# Altium PCB PowerBoard.PcbDoc
Units mm, origin at the board's own origin, x right, y up, seen from the top; angles counter-clockwise.
Board outline 150 x 100 mm, 2 copper layers (Top Layer, Bottom Layer), stack 1.671 mm thick; 51 components, 34 nets, 146 pads, 45 vias.
Unrouted connection lines stored in the file: 2.
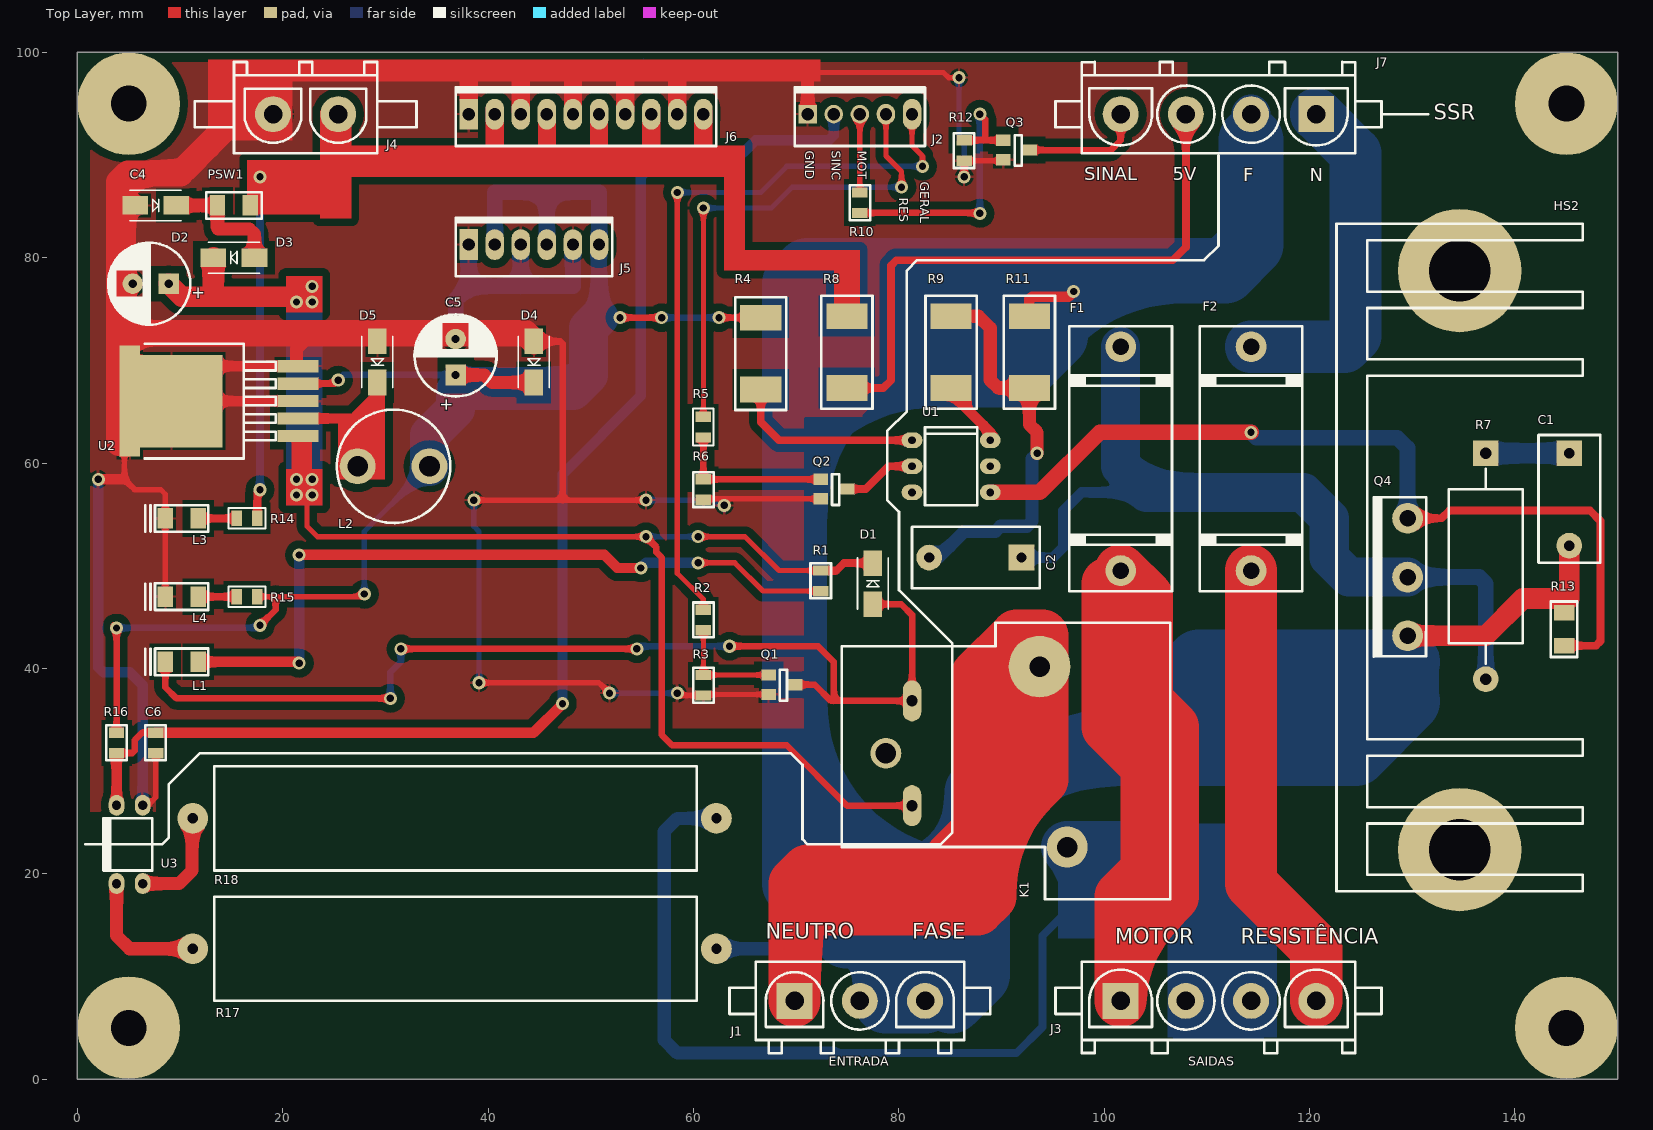
[diagram p0: Top Layer view]
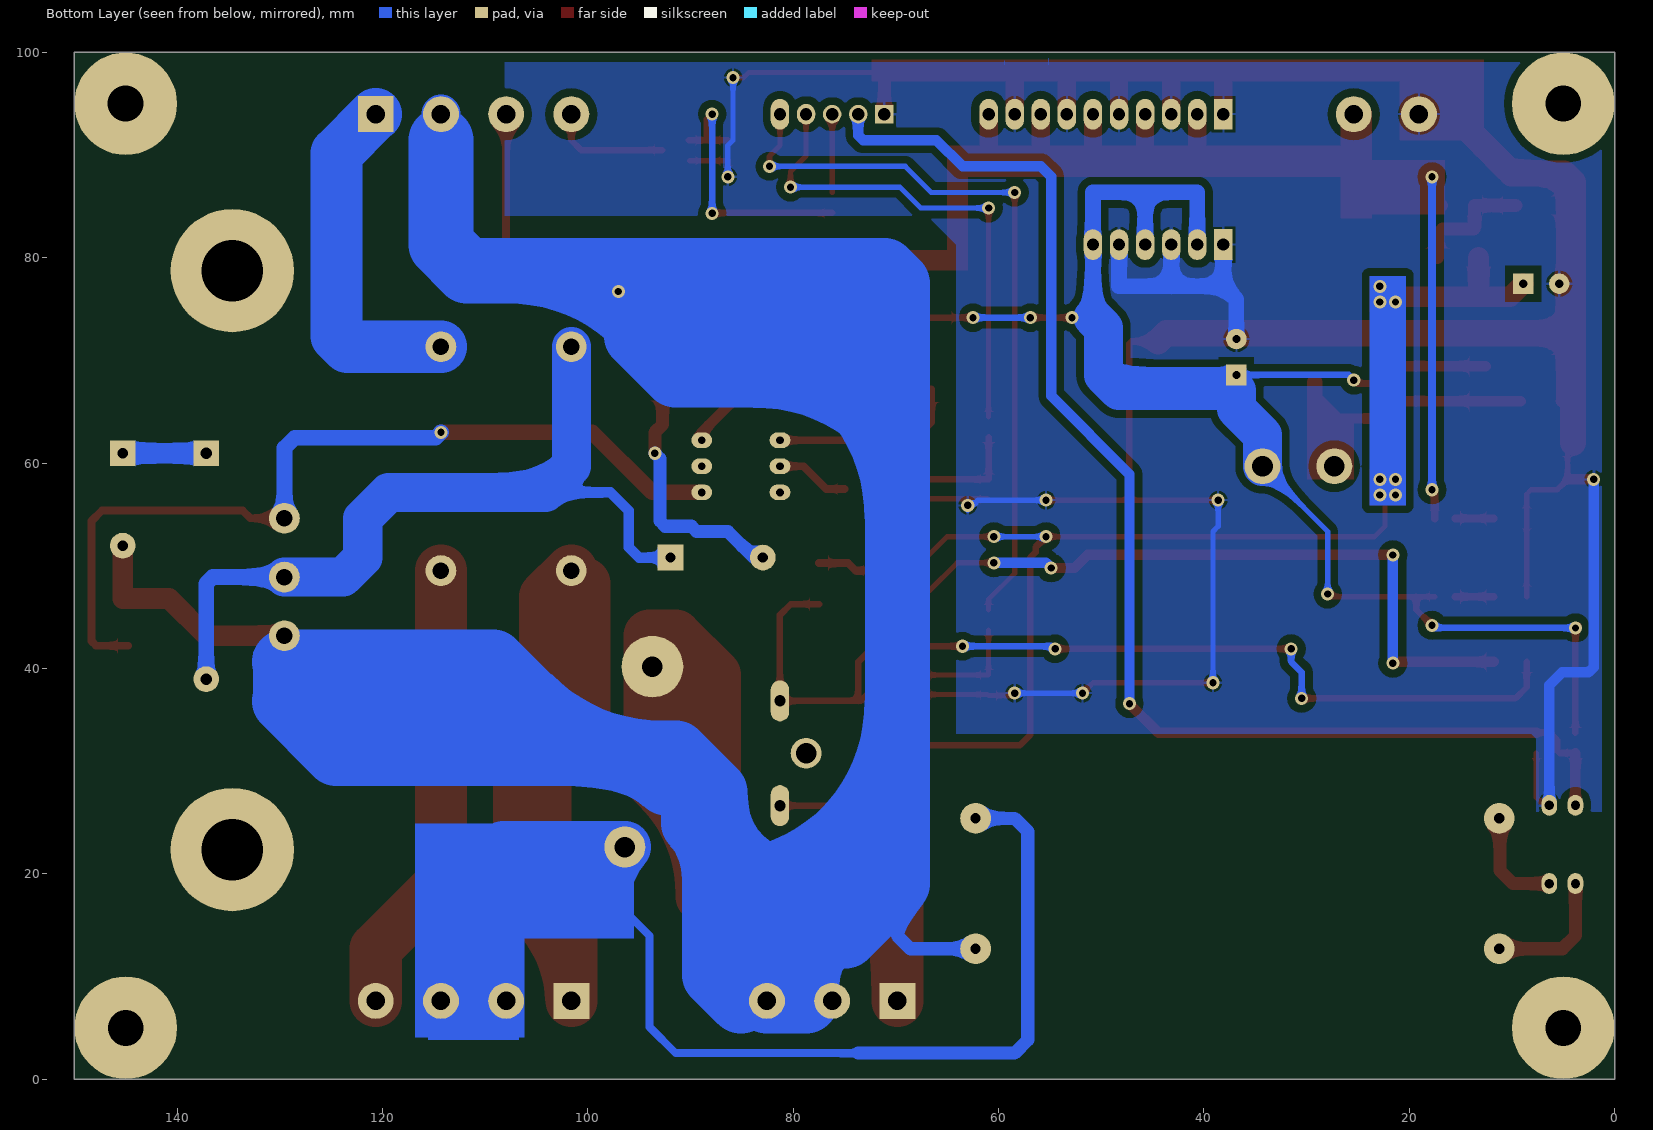
[diagram p1: Bottom Layer view, seen from below]
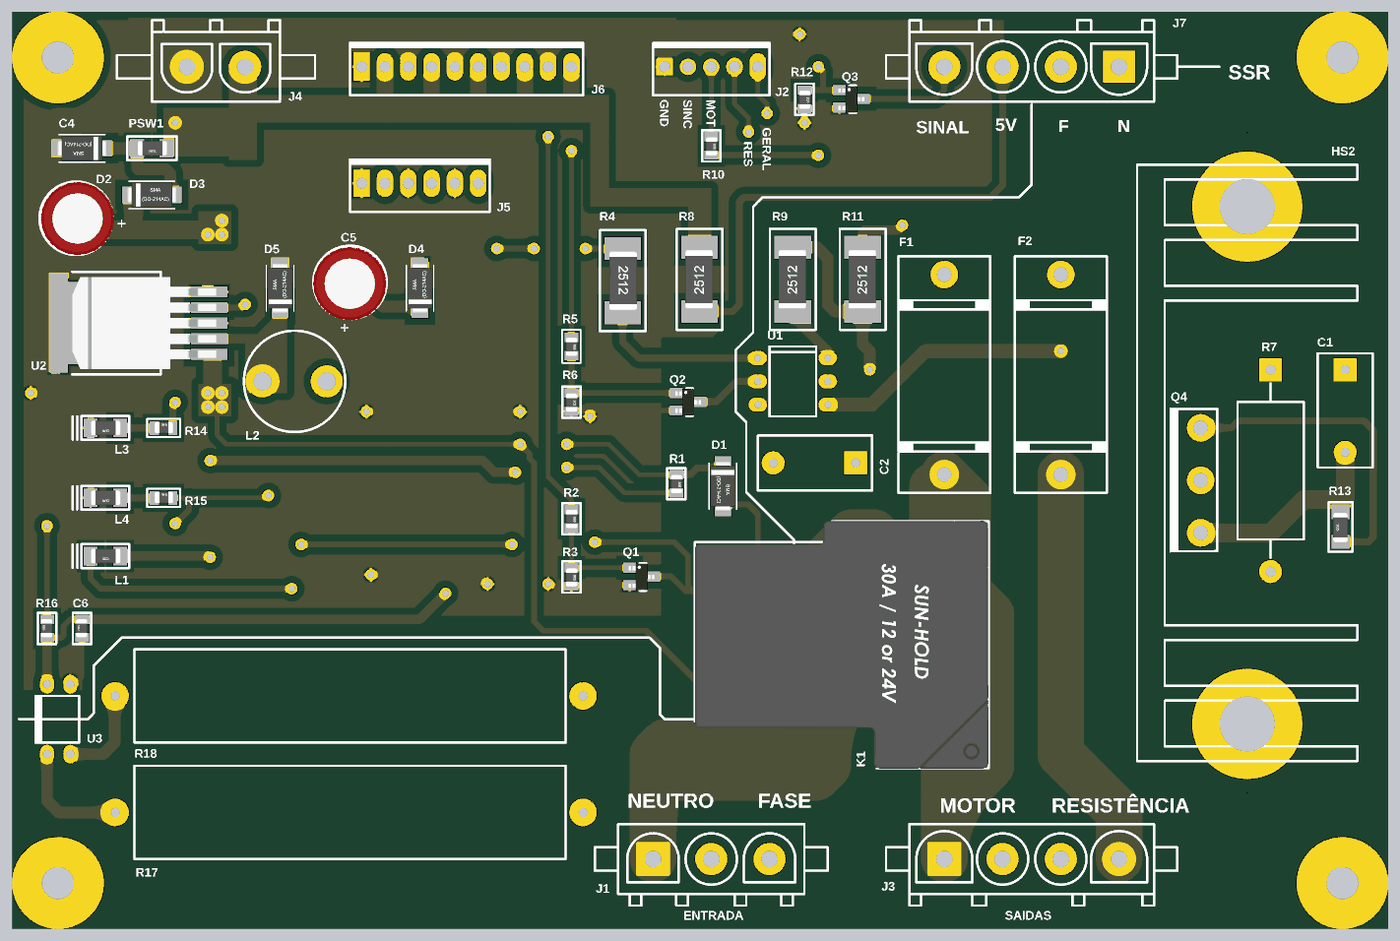
[diagram p2: 3D render of the assembled board from above, using the file's embedded part models]

## Layer stack, top to bottom
Top Solder: solder mask 0.0102, Solder Resist, Dk 3.5
Top Layer: signal copper 0.0356
Dielectric 1: dielectric 1.6, FR-4, Dk 4.8
Bottom Layer: signal copper 0.0356
Bottom Solder: solder mask 0.0102, Solder Resist, Dk 3.5

## Board outline
0,0 150,0 150,100 0,100

## Design rules (kind name [scope] priority, off if disabled: settings)
Clearance Clearance_1 [InPolygon] p1: gap=0.762
Clearance [All] p2: gap=0.508
PolygonConnect [All] p1: connectstyle=Relief reliefconductorwidth=0.254 reliefentries=4 polygonreliefangle="90 Angle" airgapwidth=0.254
RoomDefinition Sincronismo [InComponentClass('Sincronismo')] p1: confinementstyle=ConfineIn formatcopy=TRUE lockcomponents=FALSE outline -29.083,-63.881 21.717,-63.881 21.717,-38.481 -29.083,-38.481
RoomDefinition Regulador [InComponentClass('Regulador')] p2: confinementstyle=ConfineIn formatcopy=TRUE lockcomponents=FALSE outline -29.083,-63.881 21.717,-63.881 21.717,-38.481 -29.083,-38.481
RoomDefinition Potencia [InComponentClass('Potencia')] p3: confinementstyle=ConfineIn formatcopy=TRUE lockcomponents=FALSE outline -29.083,-63.881 21.717,-63.881 21.717,-38.481 -29.083,-38.481
RoomDefinition Conectores [InComponentClass('Conectores')] p4: confinementstyle=ConfineIn formatcopy=TRUE lockcomponents=FALSE outline -29.083,-63.881 21.717,-63.881 21.717,-38.481 -29.083,-38.481
RoutingVias [All] p1: holewidth=0.711 width=1.27 viastyle="Through Hole" minholewidth=0.711 minwidth=1.27 maxholewidth=0.711 maxwidth=1.27
SolderMaskExpansion [All] p1: expansion=0.102
UnpouredPolygon [All] p1: allowunpoured=FALSE
Width [All] p1: maxlimit=12.7 minlimit=0.254 preferedwidth=0.508
29 further rules are at their usual default settings.

## Classes and differential pairs
component class Sincronismo: C6 R16 R17 R18 U3
component class Regulador: C4 C5 D2 D3 D4 D5 J4 L2 L3 L4 PSW1 R14 R15 U2
component class Potencia: C1 C2 D1 F1 F2 HS2 J2 J7 K1 L1 Q1 Q2 Q3 Q4 R1 R2 R3 R4 R5 R6 R7 R8 R9 R10 R11 R12 R13 U1
component class Conectores: J1 J3 J5 J6

## Components (designator, comment, footprint, x,y, rotation, side; value= is the part's Value field where it differs from the comment)
C1 "33nF/400V" "cap 330nF/250V" 145.288,60.96 r270 top
C2 "33nF/400V" "cap 330nF/250V" 91.948,50.8 r180 top
C4 "220uF/35V" "CAP POL 8x12mm" 8.89,77.47 r180 top
C5 "470uF/35V" "CAP POL 8x12mm" 36.83,68.58 r90 top
C6 "NM" "0805-REVISADO ONDA"#1 7.62,31.75 r90 top
D1 "1N4007-SMA" "SMA DIODES" 77.47,48.26 r90 top
D2 "1N4007-SMA" "SMA DIODES" 15.24,80.01 r180 top
D3 "SMBJ30.0A" "SMA DIODES" 7.62,85.09 r0 top
D4 "SMBJ5.0A" "SMA DIODES" 44.45,69.85 r270 top
D5 "1N5819-SOD80" "SMA DIODES" 29.21,69.85 r270 top
F1 "ZH242" ZH242_REVISADO 101.6,49.53 r90 top
F2 "ZH242" ZH242_REVISADO 114.3,49.53 r90 top
HS2 "HS 40mm TO-220PÉ" "dissipador grande" 134.62,50.8 r90 top
J1 "HYLOCK FÊMEA 3 VIAS PARA PCB" "CONECTOR HYLOCK 3 VIAS" 69.85,7.62 r0 top
J2 "PCMC2-5" PCMC2-5 71.12,93.98 r0 top
J3 "HYLOCK-FÊMEA 4 VIAS PARA PCB" "CONECTOR HYLOK 4 VIAS" 101.6,7.62 r0 top
J4 "HYLOCK 2 VIAS FÊMEA P/ PCB" "CONECTOR HYLOCK 2 VIAS" 25.4,93.98 r180 top
J5 "PCMC2-6" PCMC2-6 38.1,81.28 r0 top
J6 "PCMC2-10" PCMC2-10 38.1,93.98 r0 top
J7 "HYLOCK 4 VIAS PCB" "CONECTOR HYLOK 4 VIAS" 120.65,93.98 r180 top
K1 "RELE SLA-1-D-12" "rele gigante" 96.52,40.64 r180 top
L1 "LED VERMELHO 5mm" "LED 1206" 10.16,40.64 r180 top
L2 "CNF10" "INDUTOR 47mH" 34.29,59.69 r180 top
L3 "LED VERMELHO 1206" "LED 1206" 10.16,54.61 r180 top
L4 "LED VERMELHO 1206" "LED 1206" 10.16,46.99 r180 top
PSW1 "NANOSMDC020F-2" "1206-REVISADO ONDA" 15.24,85.09 r180 top
Q1 "BC846" "SOT23 - REVISADO ONDA" 67.31,39.37 r270 top
Q2 "BC846" "SOT23 - REVISADO ONDA" 72.39,58.42 r270 top
Q3 "BC846" "SOT23 - REVISADO ONDA" 90.17,91.44 r270 top
Q4 "BTA41" "TO-247 - DUPLICATE" 129.54,43.18 r90 top
R1 "22K-0805-5%" "0805-REVISADO ONDA"#1 72.39,49.53 r270 top
R2 "1K-0805-5%" "0805-REVISADO ONDA"#1 60.96,45.72 r270 top
R3 "10K-0805-5%" "0805-REVISADO ONDA"#1 60.96,39.37 r270 top
R4 "220R-2512-5%" "2512 - REVISADO ONDA" 66.548,74.168 r270 top
R5 "1K-0805-5%" "0805-REVISADO ONDA"#2 60.96,63.5 r270 top
R6 "10K-0805-5%" "0805-REVISADO ONDA"#1 60.96,58.42 r270 top
R7 "47R-5W-5%" "RESISTOR 5W FIO" 137.16,60.96 r270 top
R8 "220R-2512-5%" "2512 - REVISADO ONDA" 74.93,67.31 r90 top
R9 "220R-2512-5%" "2512 - REVISADO ONDA" 85.09,67.31 r90 top
R10 "1K-0805-5%" "0805-REVISADO ONDA"#1 76.2,86.36 r270 top
R11 "220R-2512-5%" "2512 - REVISADO ONDA" 92.71,67.31 r90 top
R12 "10K-0805-5%" "0805-REVISADO ONDA"#1 86.36,91.44 r270 top
R13 "10K-1206-5%" "1206-REVISADO ONDA" 144.78,43.815 r90 top
R14 "2K2-0805-5%" "0805-REVISADO ONDA"#2 16.51,54.61 r0 top
R15 "1K-0805-5%" "0805-REVISADO ONDA"#2 16.51,46.99 r0 top
R16 "5K6-0805-5%" "0805-REVISADO ONDA"#1 3.81,31.75 r90 top
R17 "22K-10W-5%" "RESISTOR 10W CERAMICO" 62.23,12.7 r180 top
R18 "22K-10W-5%" "RESISTOR 10W CERAMICO" 62.23,25.4 r180 top
U1 "MOC3020" dip6 81.28,62.23 r0 top
U2 "LM2575S-5.0" TO-263-5 7.62,66.04 r90 top
U3 "TLP620" DIP-4 3.81,19.05 r90 top

## Footprints (in the part's own frame and the unit in brackets; to place one, negate y for a bottom-side part, rotate by r counter-clockwise, add the part's x,y. Pads: shape width x height; smd on the part's side, far side on the other; paste and mask are expansions set on the pad)
"0805-REVISADO ONDA"#1 [mm]
  rect 1x1.5 smd: 1(0,0) 2(2,0)
  silkscreen extent -0.7,-1 2.7,1, body extent 0.04,-0.58 2.04,0.67, height 0.78
"0805-REVISADO ONDA"#2 [mm]
  rect 1x1.5 smd: 1(-1,0) 2(1,0)
  silkscreen extent -1.8,-1 1.8,1, body extent -0.96,-0.58 1.04,0.67, height 0.78
"1206-REVISADO ONDA" [mm]
  rect 1.5x2 smd: 1(-1.6,0) 2(1.6,0)
  silkscreen extent -2.7,-1.3 2.7,1.3, body extent -1.65,-0.81 1.55,0.79, height 1
"2512 - REVISADO ONDA" [mm]
  rect 2.5x4 smd: 1(0,0) 2(7,0)
  silkscreen extent -2,-2.5 9,2.5, body extent 0.33,-1.45 6.68,1.55, height 1.6
"cap 330nF/250V" [mm]
  rect 2.5x2.5 hole 1: 1(0,0)
  round 2.5 hole 1: 2(9,0)
  silkscreen extent -1.78,-3 10.67,3
"CAP POL 8x12mm" [mm]
  rect 2x2 hole 0.8: 1(0,0)
  round 2 hole 0.8: 2(3.5,0)
  silkscreen extent -2.1,-4 5.9,4, body extent -2.25,-3.97 5.75,4.03, height 12
"CONECTOR HYLOCK 2 VIAS" [mm]
  round 3.5 hole 1.8: 1(0,0) 2(6.35,0)
  silkscreen extent -7.62,-5.08 13.97,3.8
"CONECTOR HYLOCK 3 VIAS" [mm]
  rect 3.5x3.5 hole 1.8: 1(0,0)
  round 3.5 hole 1.8: 2(6.35,0) 3(12.7,0)
  silkscreen extent -6.35,-5.08 19.05,3.8
"CONECTOR HYLOK 4 VIAS" [mm]
  rect 3.5x3.5 hole 1.8: 1(0,0)
  round 3.5 hole 1.8: 2(6.35,0) 3(12.7,0) 4(19.05,0)
  silkscreen extent -6.35,-5.08 25.4,3.8
dip6 [mil] "dip6"
  oval 80x60 hole 30: 1(0,0) 2(0,-100) 3(0,-200) 4(300,-200) 5(300,-100) 6(300,0)
  silkscreen extent 50,-250 250,50
DIP-4 [mil] "DIP-4"
  oval 80x60 hole 36: 1(0,0) 2(0,-100) 3(300,-100) 4(300,0)
  silkscreen extent 50,-138 250,50
"dissipador grande" [mm]
  round 0 all layers, no hole: ""(-36,0) ""(36,0)
  silkscreen extent -32.5,-12 32.5,12
"INDUTOR 47mH" [mm]
  round 3.5 hole 2: 1(0,0) 2(7,0)
  silkscreen extent -2.02,-5.52 9.02,5.52
"LED 1206" [mm]
  rect 1.5x2 smd: 1(-1.6,0) 2(1.6,0)
  silkscreen extent -2.6,-1.3 3.56,1.3, body extent -1.65,-0.81 1.55,0.79, height 1
PCMC2-5 [mm] "KK 2,54mm 5 VIAS"
  rect 1.8x1.8 hole 1.2: 1(0,0)
  round 1.8 hole 1.2: 2(2.54,0) 3(5.08,0)
  oval 1.8x2 hole 1.2: 4(7.62,0)
  oval 1.8x3 hole 1.2: 5(10.16,0)
  silkscreen extent -1.27,-3.1 11.43,2.6
PCMC2-6 [mm]
  rect 1.8x3 hole 1.2: 1(0,0)
  oval 1.8x3 hole 1.2: 2(2.54,0) 3(5.08,0) 4(7.62,0) 5(10.16,0) 6(12.7,0)
  silkscreen extent -1.27,-3.1 13.97,2.6
PCMC2-10 [mm]
  rect 1.8x3 hole 1.2: 1(0,0)
  oval 1.8x3 hole 1.2: 2(2.54,0) 3(5.08,0) 4(7.62,0) 5(10.16,0) 6(12.7,0) 7(15.24,0) 8(17.78,0) 9(20.32,0) 10(22.86,0)
  silkscreen extent -1.27,-3.1 24.13,2.6
"rele gigante" [mm]
  oval 1.8x4 hole 1.1: 1(15.24,3.8) 2(15.24,14)
  round 4 hole 2: 3(0.127,18.034)
  round 3 hole 2: 3'(17.78,8.9)
  round 6 hole 2: 5(2.819,0.457)
  silkscreen extent -9.91,-3.81 22.1,23.11, body extent -9.91,-3.85 22.09,23.15, height 20.2
"RESISTOR 5W FIO" [mm] "RESISTOR 5W FIO"
  rect 2.5x2.5 hole 1.1: 1(0,0)
  round 2.5 hole 1.1: 2(22,0)
  silkscreen extent 1.5,-3.6 20.5,3.6
"RESISTOR 10W CERAMICO" [mm]
  round 3 hole 1: 1(0,0) 2(51,0)
  silkscreen extent 1.9,-5.08 48.89,5.08
"SMA DIODES" [mm] "PACKAGE SMA COM DIMENSÕES DO DATASHEET DA DIODES"
  rect 2.5x1.8 smd: 1(-2,0) 2(2,0)
  silkscreen extent -2.5,-1.5 2.5,1.5, body extent -2.75,-1.4 2.75,1.4, height 2.6
"SOT23 - REVISADO ONDA" [mm]
  rect 1.1x1.4 smd: 1(0,0) 2(1.9,0) 3(0.95,2.6)
  silkscreen extent -0.5,1.1 2.5,1.8, body extent -0.45,-0.1 2.45,2.7, height 1.3
"TO-247 - DUPLICATE" [mm] "CASE 340D-01"
  round 3 hole 1.6: 1(0,0) 2(5.72,0) 3(11.44,0)
  silkscreen extent -2.02,-1.81 13.51,3.28
TO-263-5 [mm]
  rect 1.2x4 smd: 1(-3.4,-13.852) 2(-1.7,-13.852) 3(0,-13.852) 4(1.7,-13.852) 5(3.4,-13.852)
  rect 10.8x2 smd: 3(0,2.518)
  rect 9x10 smd: 3(0,-1.524)
  silkscreen extent -5.59,-11.68 5.59,1.07, body extent -5,-14.64 5,1.03, height 4.78
ZH242_REVISADO [mm] "PORTA FUSÍVEL ZH242 REVISADO EM 2015"
  round 3 hole 1.6: 1(0,0) 2(21.8,0)
  silkscreen extent -2,-5 23.8,5

## Part data
C1 C2 C6: library part 100nF/50-0805-NPO, "100nF/50-0805-NPO"
C4: library part 2200uF/50V, "2200uF/50V"
C5: library part 470uF/50V, "470uF/50V"
D1 D2: library part 1N4007, "1N4007"
F1 F2: library part "PORTA FUSÍVEL TIPO BERÇO", "PORTA FUSÍVEL TIPO BERÇO"
HS2: library part "DISSIPADOR 40mm PÉ"
J1: library part PCMC2-3, "PCMC2-3"
J3 J7: library part PCMC2-4, "PCMC2-4"
J4: library part PCMC2-2, "PCMC2-2"
K1: library part AT1RC2, "AT1RC2"
L2: library part "indutor 1mH CNF15", "1mH-CNF15-26 AWG"
L3 L4: library part "LED VERMELHO 5mm", "LED VERMELHO 5mm"
PSW1: library part "POLYSWITCH 200mA"
Q1 Q2 Q3: "BC846L"
Q4: library part BT134-TO220, "BT134"
R1 R13: library part 220R-2512-5%, "220R-2512-5%"
R2 R5 R10: library part 10K-0805-5%, "10K-0805-5%"
R14: library part 1K-0805-5%, "1K-0805-5%"
R16 R17 R18: library part 22K-0805-5%, "22K-0805-5%"
U2: library part LM2596S-ADJ, "LM2596S-ADJ"
U3: library part PC814, "PC814"

## Free pads (board coordinates)
  round 10 hole 3.5: ""(5,5) ""(5,95) ""(144.997,5) ""(145,95)
  round 12 hole 6: ""(134.62,22.352) ""(134.62,78.74)

## Via types
v1: diameter 1.27, hole 0.711, Top Layer to Bottom Layer, 45 vias

## Nets (pads, with @x,y where several pads share a name; then routed paths per layer and width w, separated by ;. In a path a pad name is that pad's centre, name@x,y a point inside that pad or via, vN(x,y) a via of type N, cw(c..) or ccw(c..) an arc to the next point about the centre after c; other vN are vias at no path point)
5V: C5.1 D4.2 J5.2 J5.4 J5.6 L2.1 R4.1 R15.2 R16.2 U2.4 | length 164.5
  Top Layer w0.508: R15.2 19.304,46.99 27.686,46.99 v1(27.94,47.244)
  Top Layer w0.635: v1@3.556,44.196 v1(3.81,43.942) R16.2 ; v1(17.78,44.196) 19.304,45.72 19.304,46.99 ; U2.4 25.068,67.74 v1(25.4,68.072) ; v1(52.832,74.168) v1(56.896,74.168) ; v1(62.484,74.168) R4.1
  Top Layer w1.27: C5.1 39.624,68.58 40.354,67.85 D4.2
  Bottom Layer w0.508: v1(27.94,47.244) 27.94,53.34 L2.1
  Bottom Layer w0.635: v1(3.81,43.942) 17.526,43.942 v1(17.78,44.196) ; v1(25.4,68.072) 25.908,68.58 C5.1 ; v1(56.896,74.168) v1(62.484,74.168)
  Bottom Layer w1.524: C5.1 49.784,68.58 ; J5.2 40.64,86.36 45.72,86.36 ; J5.4 45.72,86.36 ; 50.8,74.168 J5.6 50.8,86.36 45.72,86.36
  Bottom Layer w3.81: L2.1 34.29,62.738 36.83,65.278 36.83,67.056 48.26,67.056 49.784,68.58 49.784,73.152 50.8,74.168
11V: C4.1 D1.2 D2.2 K1.2 R1.1 U2.1 | length 145.5
  Top Layer w0.508: 22.352,56.388 22.352,53.848 23.368,52.832 v1(55.372,52.832) ; v1(60.452,52.832) 65.024,52.832 68.326,49.53 R1.1
  Top Layer w0.635: v1(55.372,52.832) 56.388,51.816 56.388,51.308 56.896,50.8 56.896,33.528 57.912,32.512 69.088,32.512 74.96,26.64 K1.2
  Top Layer w0.762: D2.2@13.208,79.978 D2.2 ; v1(21.336,58.42) 21.472,58.556 U2.1 ; R1.1 73.914,49.53 74.644,50.26 D1.2
  Top Layer w2.032: C4.1 10.16,76.2 20.828,76.2 v1(21.336,75.692) ; 13.24,76.232 D2.2
  Bottom Layer w0.508: v1(55.372,52.832) v1(60.452,52.832)
  Bottom Layer w0.762: v1(21.336,58.42) v1(21.336,75.692)
  other v1: 21.336,56.896 22.86,56.896 22.86,58.42 22.86,75.692 22.86,77.216
12V: J4.1 J6.2 J6.4 J6.6 J6.8 J6.10 PSW1.1 R8.2 R14.2 | length 141.3
  Top Layer w0.762: R14.2 17.51,57.134 v1(17.78,57.404) ; v1(17.78,87.884) 24.892,87.884 ; 60.96,89.916 63.5,89.916 64.008,89.408 64.008,80.772 65.024,79.756 74.168,79.756 74.93,78.994 R8.2
  Top Layer w1.27: PSW1.1 24.13,85.09 25.4,86.36 25.4,89.916 ; J4.1 25.4,89.916 ; J6.2 40.64,89.916 ; J6.4 45.72,89.916 ; J6.6 50.8,89.916 ; J6.8 55.88,89.916 ; J6.10 60.96,89.916 55.88,89.916 ; 25.4,89.916 40.64,89.916 ; 40.64,89.916 45.72,89.916 ; 45.72,89.916 50.8,89.916 ; 50.8,89.916 55.88,89.916
  Bottom Layer w0.762: v1(17.78,57.404) v1(17.78,87.884)
ENTRADA_FASE: C1.2 J1.2 J1.3 J7.2 Q4.1 R11.2 R13.2 R17.1 | length 442.6
  Top Layer w0.762: C1.2@145.288,51.562 C1.2
  Top Layer w1.016: R11.2 92.71,75.946 92.964,76.2 96.52,76.2 v1(97.028,76.708)
  Top Layer w2.032: Q4.1 137.16,43.18 140.792,46.812 145.288,46.812 C1.2@145.288,51.562
  Bottom Layer w1.27: R17.1 68.58,12.7 69.85,13.97 69.85,19.05
  Bottom Layer w3.81: 114.3,91.44 J7.2
  Bottom Layer w6.35: 69.85,29.21 81.28,17.78 ; 69.85,62.23 86.36,78.74 ; 69.85,66.04 80.01,76.2 ; 69.85,72.39 76.2,78.74 ; 72.39,68.58 91.44,68.58 95.25,72.39 95.25,78.74 ; 78.74,13.97 74.93,13.97 69.85,19.05 ; 78.74,19.05 78.74,7.62 J1.3 82.55,17.78 ; 79.375,71.755 94.615,71.755 ; 85.09,7.62 87.63,10.16 87.63,19.05 ; 87.63,22.86 89.71,24.94 89.71,27.104 91.44,28.834 92.334,28.834 95.25,31.75 ; 94.615,73.025 100.33,78.74 ; 100.33,31.75 109.22,40.64 129.54,40.64 ; 114.3,91.44 114.3,81.28 111.76,78.74 71.12,78.74 69.85,77.47 69.85,19.05 ; 129.54,36.83 124.46,31.75 91.44,31.75 87.63,27.94 87.63,19.05 ; 69.85,19.05 87.63,19.05
GND: C4.2 C5.2 C6.1 D3.1 D4.1 D5.1 J2.1 J4.2 J5.1 J5.3 J5.5 J6.1 J6.3 J6.5 J6.7 J6.9 L3.2 L4.2 Q1.2 Q2.2 Q3.2 R3.2 R6.2 R12.2 U2.3 U2.5 U3.3 | length 445.5
  Top Layer w0.508: U2.3@4.572,65.51 4.572,58.42 5.588,57.404 8.128,57.404 8.56,56.972 L3.2 L4.2 ; U3.3 6.858,26.67 7.62,27.432 C6.1 ; v1(38.608,56.388) 47.244,56.388 v1(55.372,56.388) ; v1(39.116,38.608) 50.8,38.608 v1(51.816,37.592) ; v1(58.42,37.592) 58.642,37.37 R3.2 ; R3.2@61.06,37.47 Q1.2 ; R6.2@61.06,56.52 62.992,56.52 ; v1(62.992,55.88) 62.992,56.52 ; 71.628,98.044 84.328,98.044 84.836,97.536 v1(85.852,97.536) ; Q2.2 62.992,56.52 ; v1(86.36,87.884) R12.2 Q3.2@90.07,89.44
  Top Layer w0.635: D4.1 47.022,71.85 47.244,71.628 47.244,56.388
  Top Layer w1.016: v1(2.032,58.42) 4.572,58.42 ; U2.3@9.144,66.04 U2.3@21.472,66.04 ; U2.3@12.544,69.44 U2.5
  Top Layer w1.27: U2.3@5.102,66.04 5.08,66.062 5.08,72.644 5.08,88.222 5.08,88.857 10.668,88.857 11.387,88.857 12.7,90.17 12.7,90.889 ; J4.2 19.05,98.298 19.304,98.552 58.42,98.552 ; 21.336,70.104 21.336,71.12 22.066,71.85 ; J6.1 38.1,98.044 ; J6.3 43.18,98.044 ; J6.5 48.26,98.044 ; J6.7 53.34,98.044 ; J6.9 58.42,98.552 ; J2.1 71.12,98.552 58.42,98.552
  Top Layer w2.54: 4.064,61.976 4.064,72.644 ; J4.2 15.791,93.98 12.7,90.889 10.668,88.857 10.033,88.222 5.08,88.222 4.91,88.222 4.064,87.376 4.064,72.644 ; D4.1 43.656,72.644 5.08,72.644 4.064,72.644
  Bottom Layer w0.508: v1(38.608,56.388) 38.608,53.848 39.116,53.34 v1(39.116,38.608) ; v1(51.816,37.592) v1(58.42,37.592) ; v1(55.372,56.388) 61.976,56.388 62.992,55.372 v1(62.992,55.88) ; v1(85.852,97.536) 85.852,91.44 86.36,90.932 v1(86.36,87.884)
  Bottom Layer w1.016: v1(2.032,58.42) 2.032,40.132 2.54,39.624 5.08,39.624 6.35,38.354 U3.3
  Bottom Layer w1.524: C5.2 36.83,75.946 38.1,77.216 ; J5.1 38.1,77.216 ; J5.3 43.18,77.216 ; J5.5 48.26,77.216 43.18,77.216 ; 38.1,77.216 43.18,77.216
NetC1_1: C1.1 R7.1 | length 8.1
  Bottom Layer w2.032: R7.1 C1.1
NetC2_1: C2.1 F1.2 Q4.2 R7.2 | length 80.4
  Bottom Layer w1.016: C2.1 94.996,50.8 96.012,51.816 96.012,55.372 97.79,57.15 104.14,57.15
  Bottom Layer w1.524: Q4.2 136.52,48.9 137.16,48.26 R7.2
  Bottom Layer w3.81: F1.2 101.6,59.69 104.14,57.15 119.38,57.15 121.92,54.61 121.92,50.8 123.82,48.9 Q4.2
NetC2_2: C2.2 R9.2 R11.1 | length 38.5
  Top Layer w1.27: R9.2 87.742,74.31 88.9,73.152 88.9,68.072 89.662,67.31 R11.1 92.71,63.754 93.472,62.992 v1(93.472,60.96)
  Bottom Layer w1.27: C2.2 83.82,50.8 86.36,53.34 89.408,53.34 89.916,53.848 92.456,53.848 92.964,54.356 92.964,60.452 v1(93.472,60.96)
NetD1_1: D1.1 K1.1 L1.2 Q1.3 | length 101.4
  Top Layer w0.635: L1.2 8.56,38.176 9.652,37.084 v1(30.48,37.084) ; v1(31.496,41.91) v1(54.483,41.91) ; v1(63.5,42.164) 72.136,42.164 73.66,40.64 73.66,36.84 ; Q1.3 71.816,38.42 73.396,36.84 73.66,36.84 ; D1.1 80.232,46.26 81.28,45.212 K1.1 73.66,36.84
  Bottom Layer w0.635: v1(30.48,37.084) 30.48,39.624 31.496,40.64 v1(31.496,41.91) ; v1(54.483,41.91) 54.737,42.164 v1(63.5,42.164)
NetD2_1: D2.1 D3.2 PSW1.2 | length 12.4
  Top Layer w1.27: D3.2 PSW1.2 13.64,82.88 13.716,82.804 16.764,82.804 17.24,82.328 D2.1
NetD5_2: D5.2 L2.2 U2.2 | length 14.6
  Top Layer w1.016: U2.2 27.1,64.34
  Top Layer w1.524: L2.2 27.29,64.374 29.21,66.294 D5.2
NetF2_2: F2.2 J7.1 | length 33.8
  Bottom Layer w5.08: F2.2 123.4,71.33 124.46,72.39 124.46,90.17 J7.1
NetJ2_3: J2.3 R10.1 | length 7.6
  Top Layer w0.508: R10.1 J2.3
NetJ2_4: J2.4 R5.1 | length 48.2
  Top Layer w0.508: R5.1 v1(60.96,84.836) ; J2.4 78.74,89.916 80.264,88.392 v1(80.264,86.868)
  Bottom Layer w0.508: v1(60.96,84.836) 67.564,84.836 69.596,86.868 v1(80.264,86.868)
NetJ2_5: J2.5 R2.1 | length 72.1
  Top Layer w0.508: v1(58.42,86.36) 58.42,49.276 60.96,46.736 R2.1 ; J2.5 81.28,90.932 82.296,89.916 v1(82.296,88.9)
  Bottom Layer w0.508: v1(58.42,86.36) 66.548,86.36 69.088,88.9 v1(82.296,88.9)
NetJ7_3: J7.3 R8.1 | length 58.2
  Top Layer w0.762: R8.1 78.486,67.31 79.248,68.072 79.248,79.248 79.756,79.756 106.68,79.756 107.95,81.026 J7.3
NetJ7_4: J7.4 Q3.3 | length 11.8
  Top Layer w0.635: Q3.3 100.65,90.49 101.6,91.44 J7.4
NetL1_1: L1.1 R1.2 | length 73.1
  Top Layer w0.508: v1(60.452,50.292) 64.008,50.292 66.77,47.53 R1.2
  Top Layer w1.016: L1.1 21.463,40.64 v1(21.59,40.513) ; v1(21.59,51.054) 51.308,51.054 52.578,49.784 v1(54.864,49.784)
  Bottom Layer w1.016: v1(21.59,40.513) v1(21.59,51.054) ; v1(54.864,49.784) 55.372,50.292 v1(60.452,50.292)
NetL3_1: L3.1 R14.1 | length 3.8
  Top Layer w0.762: L3.1 R14.1
NetL4_1: L4.1 R15.1 | length 3.8
  Top Layer w0.762: L4.1 R15.1
NetQ1_1: Q1.1 R2.2 R3.1 | length 10.7
  Top Layer w0.508: R2.2 R3.1 Q1.1
NetQ2_1: Q2.1 R5.2 R6.1 | length 15.5
  Top Layer w0.635: R5.2 R6.1 Q2.1
NetQ2_3: Q2.3 U1.2 | length 7.2
  Top Layer w0.762: Q2.3 76.774,57.47 78.994,59.69 U1.2
NetQ3_1: Q3.1 R10.2 R12.1 | length 28
  Top Layer w0.635: R10.2 87.852,84.36 v1(87.884,84.328) ; R12.1 88.265,91.44 ; v1(87.884,93.98) 88.392,93.472 88.392,91.567 88.265,91.44 ; Q3.1 88.265,91.44
  Bottom Layer w0.635: v1(87.884,84.328) v1(87.884,93.98)
NetQ4_3: Q4.3 R13.1 U1.4 | length 85.5
  Top Layer w0.635: Q4.3 Q4.3@129.921,54.62
  Top Layer w0.762: Q4.3@129.921,54.62 132.852,54.62 133.604,55.372 147.32,55.372 148.336,54.356 148.336,42.672 147.879,42.215 R13.1
  Top Layer w1.524: U1.4 93.726,57.15 99.568,62.992 v1(114.3,62.992)
  Bottom Layer w1.524: v1(114.3,62.992) 114.808,62.484 128.524,62.484 129.54,61.468 Q4.3
NetR4_2: R4.2 U1.1 | length 18.6
  Top Layer w0.762: R4.2 66.548,64.008 68.326,62.23 U1.1
NetR9_1: R9.1 U1.6 | length 6.7
  Top Layer w1.016: R9.1 85.09,66.802 88.9,62.992 U1.6
NetR17_2: R17.2 U3.1 | length 13
  Top Layer w1.27: U3.1 3.81,13.97 5.08,12.7 R17.2
NetR18_2: R18.2 U3.2 | length 10.5
  Top Layer w1.27: U3.2 9.906,19.05 11.176,20.32 11.176,25.346 R18.2
NEUTRO: J1.1 K1.5 | length 126.3
  Top Layer w5.08: J1.1 69.85,15.24 ; K1.5 88.9,35.382 88.9,17.78 87.63,16.51 71.12,16.51 69.85,15.24 ; 69.85,15.24 69.85,19.05 71.12,20.32 85.09,20.32 ; 85.09,20.32 88.9,24.13 93.98,29.21 93.98,43.18 91.44,43.18 87.63,39.37 87.63,24.13 85.09,21.59 85.09,20.32
NEUTRO_GERAL: J3.2 J3.3 K1.3 R18.1 | length 110.6
  Bottom Layer w0.762: 73.66,2.54 91.44,2.54 93.98,5.08 93.98,13.97 96.393,16.383 K1.3
  Bottom Layer w1.27: R18.1 58.42,25.4 57.15,24.13 57.15,3.81 58.42,2.54 73.66,2.54
  Bottom Layer w5.08: K1.3 108.204,22.606 110.49,20.32 110.49,7.62
SAIDA_MOTOR: F1.1 J3.1 | length 89.4
  Top Layer w5.08: 100.33,48.26 100.33,34.29 104.14,30.48 104.14,20.32 101.6,17.78 J3.1 101.6,12.7 106.68,17.78 106.68,34.29 104.14,36.83 104.14,46.99 F1.1
SAIDA_RESISTENCIA: F2.1 J3.4 | length 44.5
  Top Layer w5.08: F2.1 114.3,19.05 120.65,12.7 J3.4
SINCRONISMO: C6.2 J2.2 R16.1 U3.4 | length 128.1
  Top Layer w0.635: R16.1 5.334,31.75 5.588,32.004 5.588,33.02 6.318,33.75 C6.2
  Top Layer w1.016: U3.4 R16.1 ; C6.2 44.418,33.75 v1(47.244,36.576)
  Bottom Layer w1.016: v1(47.244,36.576) 47.244,58.928 54.864,66.548 54.864,87.884 55.88,88.9 63.5,88.9 66.04,91.44 73.152,91.44 73.66,91.948 J2.2
pads on no net: HS2. K1.3' U1.3 U1.5

## Polygon pours and split planes (outlines as drawn)
GND on Top Layer "Bottom Layer-No Net" (solid, pour order 2): 1.27,26.035 7.62,26.035 7.62,33.75 8.033,34.163 70.739,34.163 70.739,64.389 70.866,64.516 76.454,64.516 76.454,64.643 79.375,67.564 79.248,67.691 79.248,79.248 79.756,79.756 106.68,79.756 108.077,81.153 108.077,99.06 1.524,99.06 1.27,98.806
GND on Bottom Layer "Bottom Layer-No Net" (solid, pour order 4): 1.27,26.035 7.62,26.035 7.62,33.147 8.128,33.655 64.135,33.655 64.135,81.28 66.802,83.947 66.929,84.074 108.077,84.074 108.077,99.06 1.27,99.06

## Other copper
Top Layer:
  rectangle net 12V: 16.51,84.201 26.67,89.535
  rectangle net 12V: 23.622,83.82 26.67,94.361
  rectangle net GND: 12.7,98.425 72.39,99.314
  rectangle net GND: 57.531,94.107 59.309,97.79
  rectangle net GND: 52.451,94.234 54.229,97.79
  rectangle net GND: 47.371,94.361 49.149,97.536
  rectangle net GND: 42.291,94.107 44.069,97.536
  rectangle net GND: 37.211,95.25 38.989,98.171
  rectangle net GND: 12.7,91.44 20.955,99.06
  rectangle net GND: 12.7,97.155 72.39,99.06
  rectangle net 12V: 60.071,89.662 61.849,94.361
  rectangle net 12V: 54.991,89.535 56.769,94.615
  rectangle net 12V: 49.911,89.916 51.689,94.615
  rectangle net 12V: 44.831,90.17 46.609,94.742
  rectangle net 12V: 39.751,89.662 41.529,94.615
  rectangle net 12V: 73.66,74.676 76.2,80.772
  rectangle net 12V: 62.992,78.74 76.2,80.772
  rectangle net 12V: 62.992,78.74 65.024,87.884
  rectangle net 12V: 24.892,87.884 65.024,90.932
  rectangle net NetD5_2: 28.448,58.42 29.972,67.056
  rectangle net NetD5_2: 25.4,58.42 28.956,64.516
  rectangle net 11V: 20.32,55.88 23.876,59.436
  rectangle net 11V: 20.32,74.676 23.876,78.232
  rectangle net 11V: 20.828,58.928 22.86,62.484
Bottom Layer:
  rectangle net ENTRADA_FASE: 131.064,37.084 132.588,41.656
  rectangle net NEUTRO_GERAL: 95.504,13.716 116.332,24.892
  rectangle net NEUTRO_GERAL: 106.172,4.064 116.84,24.892
  rectangle net ENTRADA_FASE: 83.82,73.66 95.25,78.74
  rectangle net ENTRADA_FASE: 106.68,33.02 128.27,39.37
  rectangle net NEUTRO_GERAL: 106.68,3.81 115.57,11.43
  rectangle net 11V: 20.32,55.88 23.876,59.436
  rectangle net 11V: 20.32,59.436 23.876,78.232

## Silkscreen, mask and mechanical layers (free items; w line width, h text height)
Top Overlay:
  lines w0.254: 0.762,22.86 8.255,22.86 8.89,23.495 8.89,28.702 11.938,31.75 69.469,31.75 70.612,30.607 70.612,23.368 71.12,22.86 84.074,22.86 85.217,24.003 85.217,42.418 80.01,47.625 80.01,55.245 78.867,56.388 78.867,63.119 80.772,65.024 80.772,78.74 81.788,79.756 109.728,79.756 111.125,81.153 111.125,89.916 ; 127,93.98 131.572,93.98
  text "SSR" at 132.08,92.964 h2.54
  text "GND" at 70.612,90.424 h1.52 r270
  text "SINC" at 73.152,90.424 h1.52 r270
  text "MOT" at 75.692,90.424 h1.52 r270
  text "GERAL" at 81.788,87.376 h1.52 r270
  text "SINAL" at 98.044,87.122 h2.2
  text "5V" at 106.68,87.122 h2.2
  text "F" at 113.538,86.995 h2.2
  text "N" at 120.015,86.995 h2.2
  text "RES" at 79.756,85.852 h1.52 r270
  text "NEUTRO" at 67.056,13.208 h2.54
  text "FASE" at 81.28,13.208 h2.54
  text "MOTOR" at 101.092,12.7 h2.54
  text "RESISTÊNCIA" at 113.284,12.7 h2.54
  text "ENTRADA" at 73.152,1.016 h1.52
  text "SAIDAS" at 108.204,1.016 h1.52
Mechanical 1:
  lines w0.254: 0,0 0,100 ; 0,0 150,0 ; 0,0 0,-5 150,-5 150,0 ; 0,100 150,100 ; 0,100 0,105 150,105 150,100 ; 150,0 150,100
  text "BORDA P/ FIXAÇÃO NO PALLET DE MONTAGEM" at 51.816,101.6 h2.5
  text "BORDA P/ FIXAÇÃO NO PALLET DE MONTAGEM" at 49.784,-3.302 h2.5
  text "PRODUZIR EM 2 Oz/Ft²" at 0,-11.684 h5

## Text inside footprints (layer, text, board x,y; h text height)
C4: Top Overlay "+" at 12.446,77.47 h2 r180
C5: Top Overlay "+" at 36.83,65.024 h2 r90